# Altium PCB SP3T.PcbDoc
Units mm, origin at the board's own origin, x right, y up, seen from the top; angles counter-clockwise.
Board outline 44 x 35 mm, 4 copper layers (Top Layer, Signal Layer 2, Signal Layer 1, Bottom Layer), stack 1.47 mm thick; 25 components, 9 nets, 83 pads, 159 vias.
Unrouted connection lines stored in the file: 5.
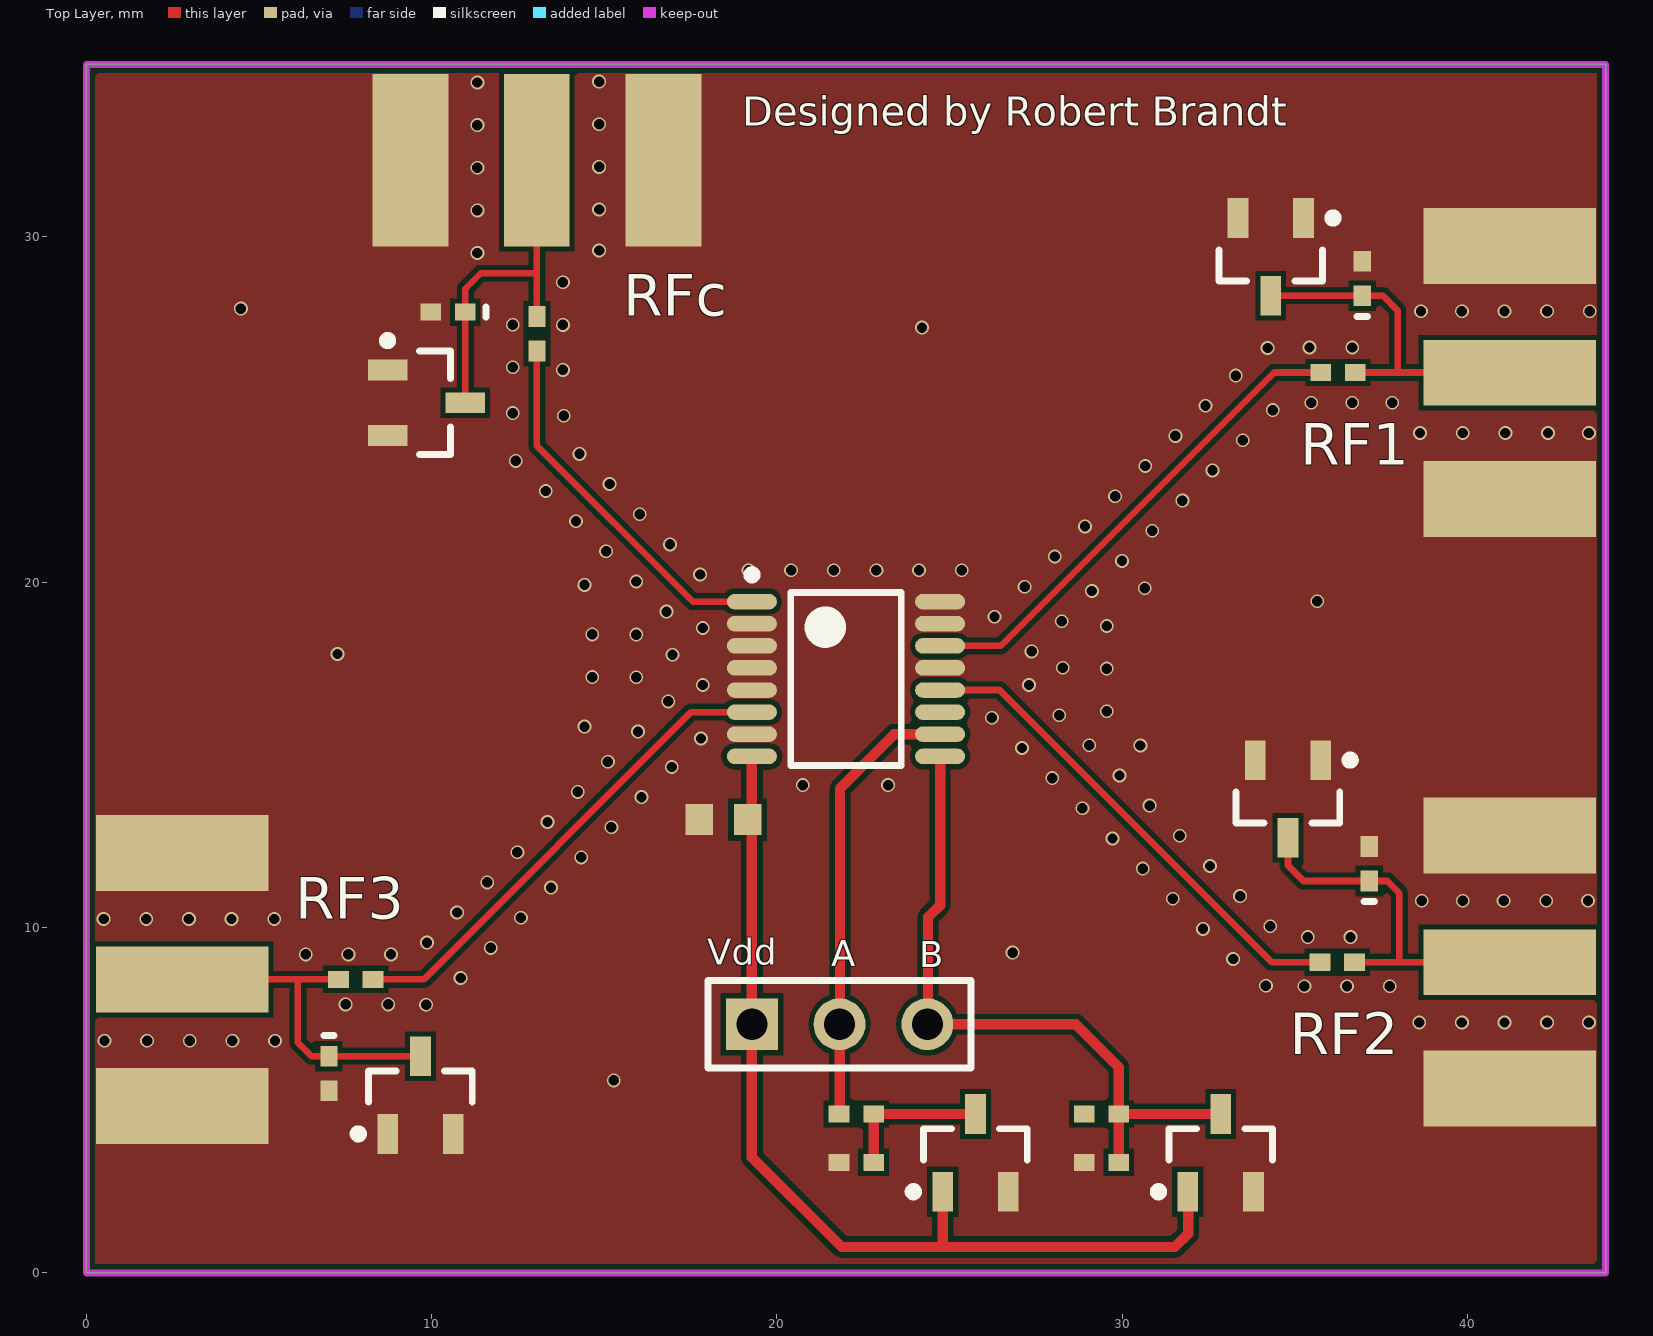
[diagram p0: Top Layer view]
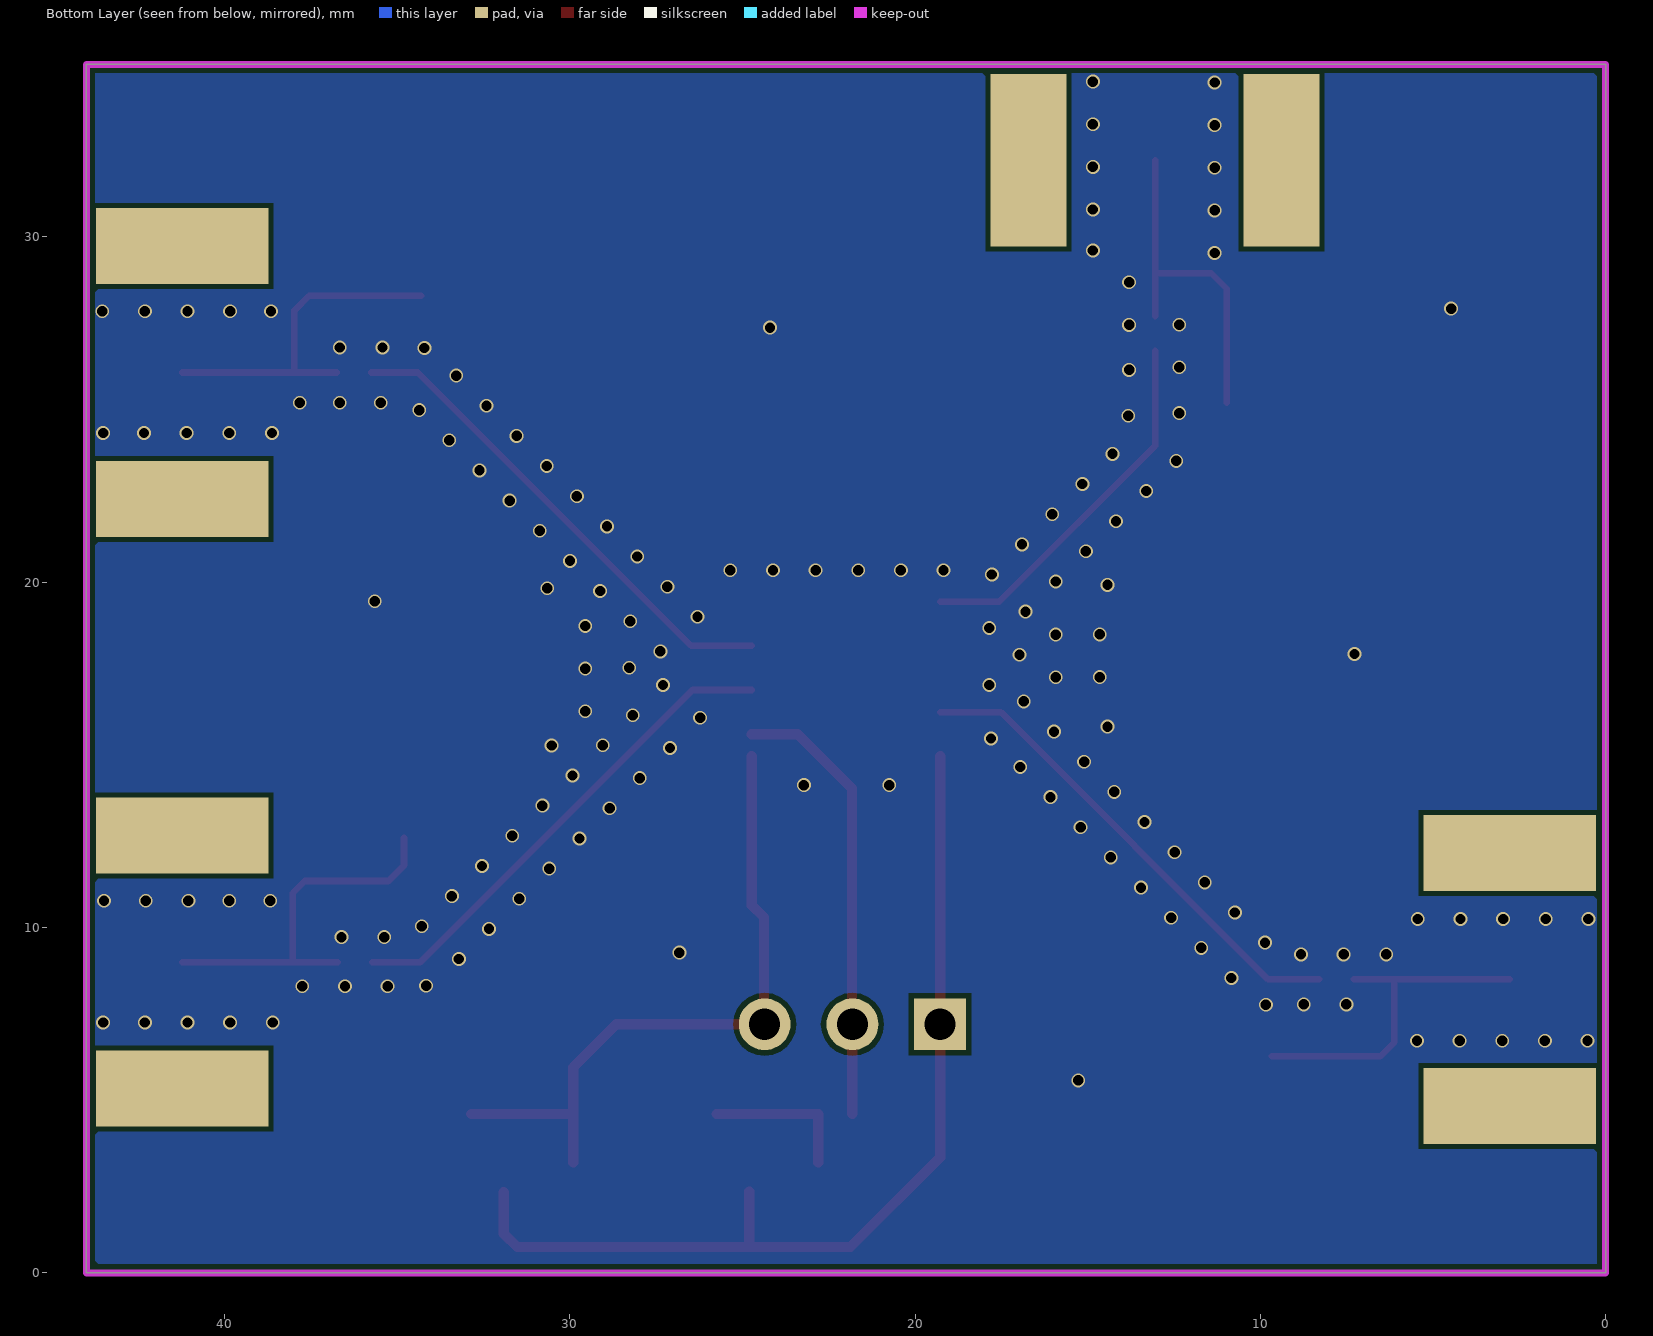
[diagram p1: Bottom Layer view, seen from below]
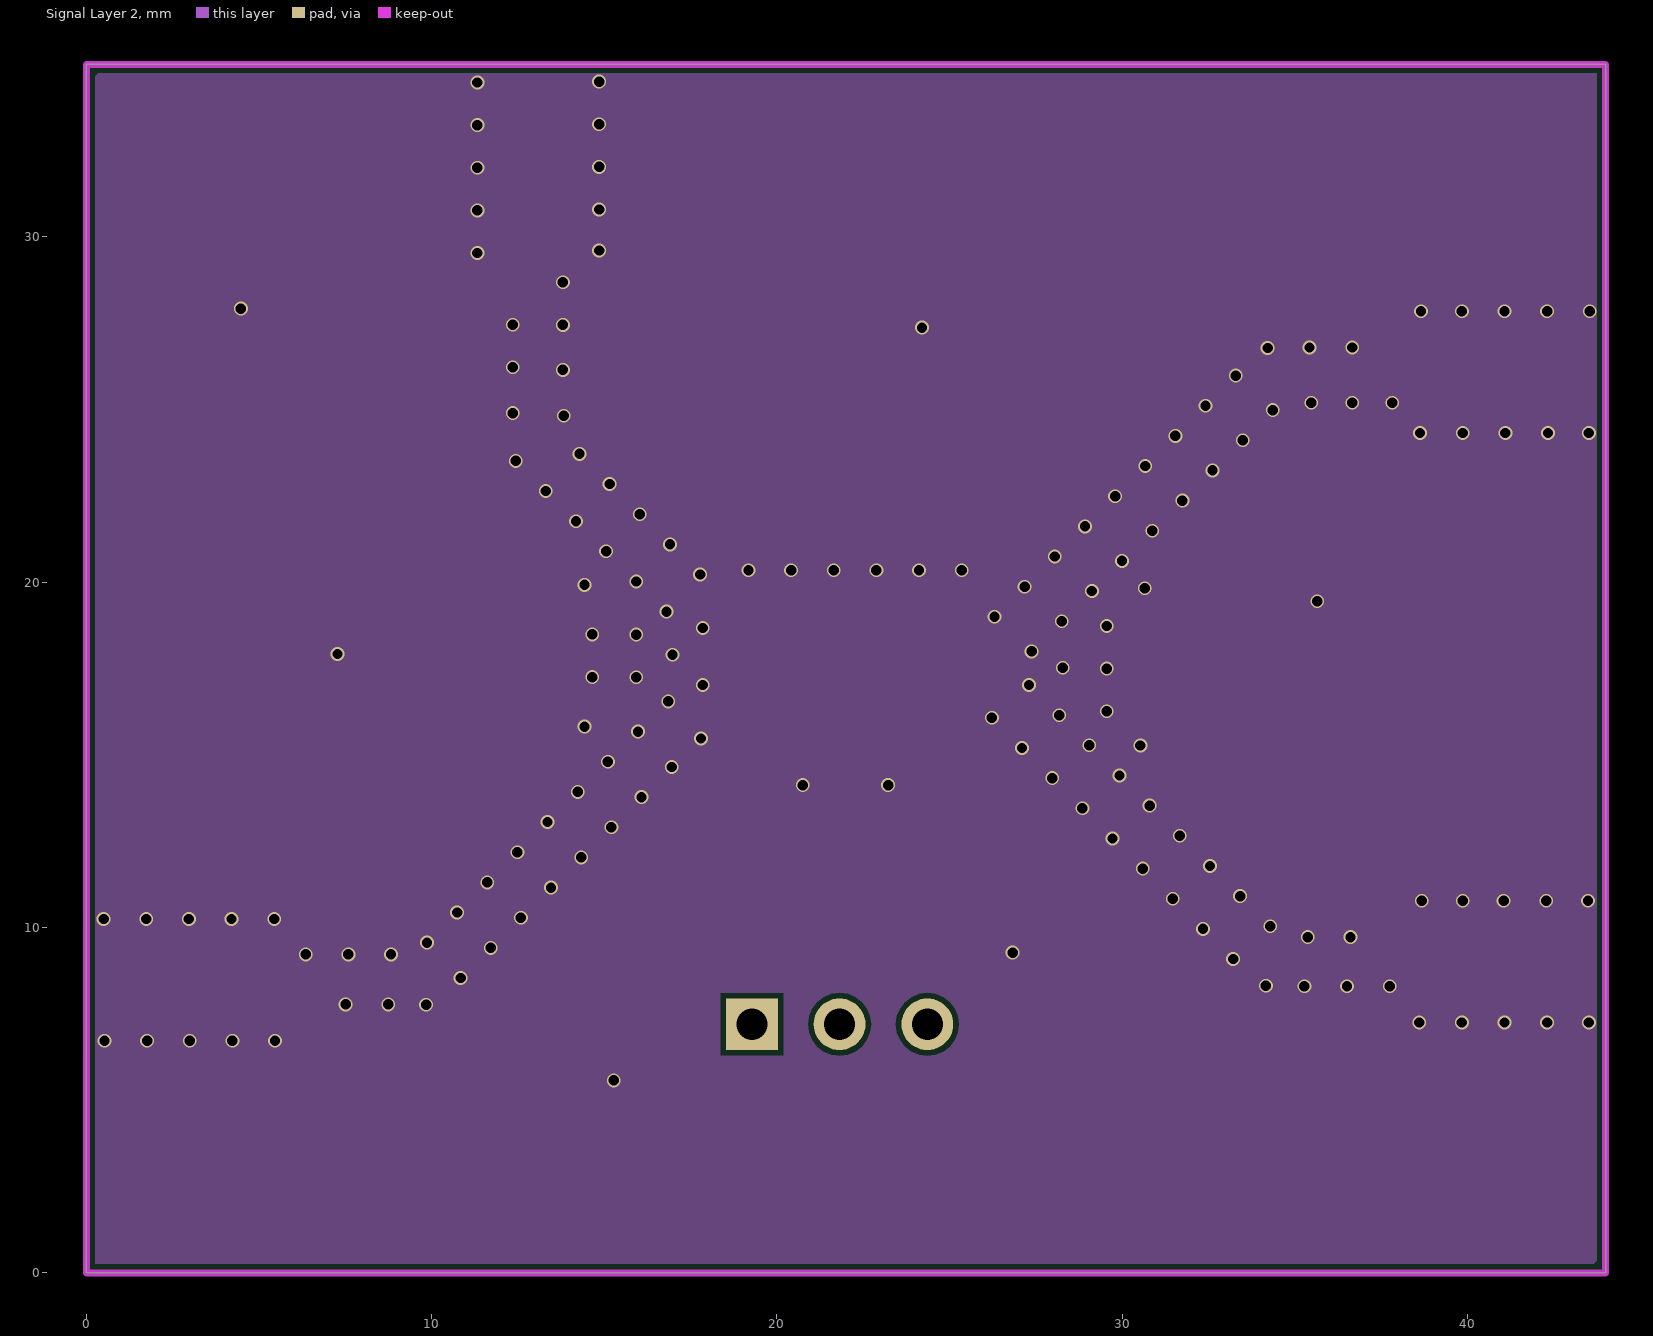
[diagram p2: Signal Layer 2]
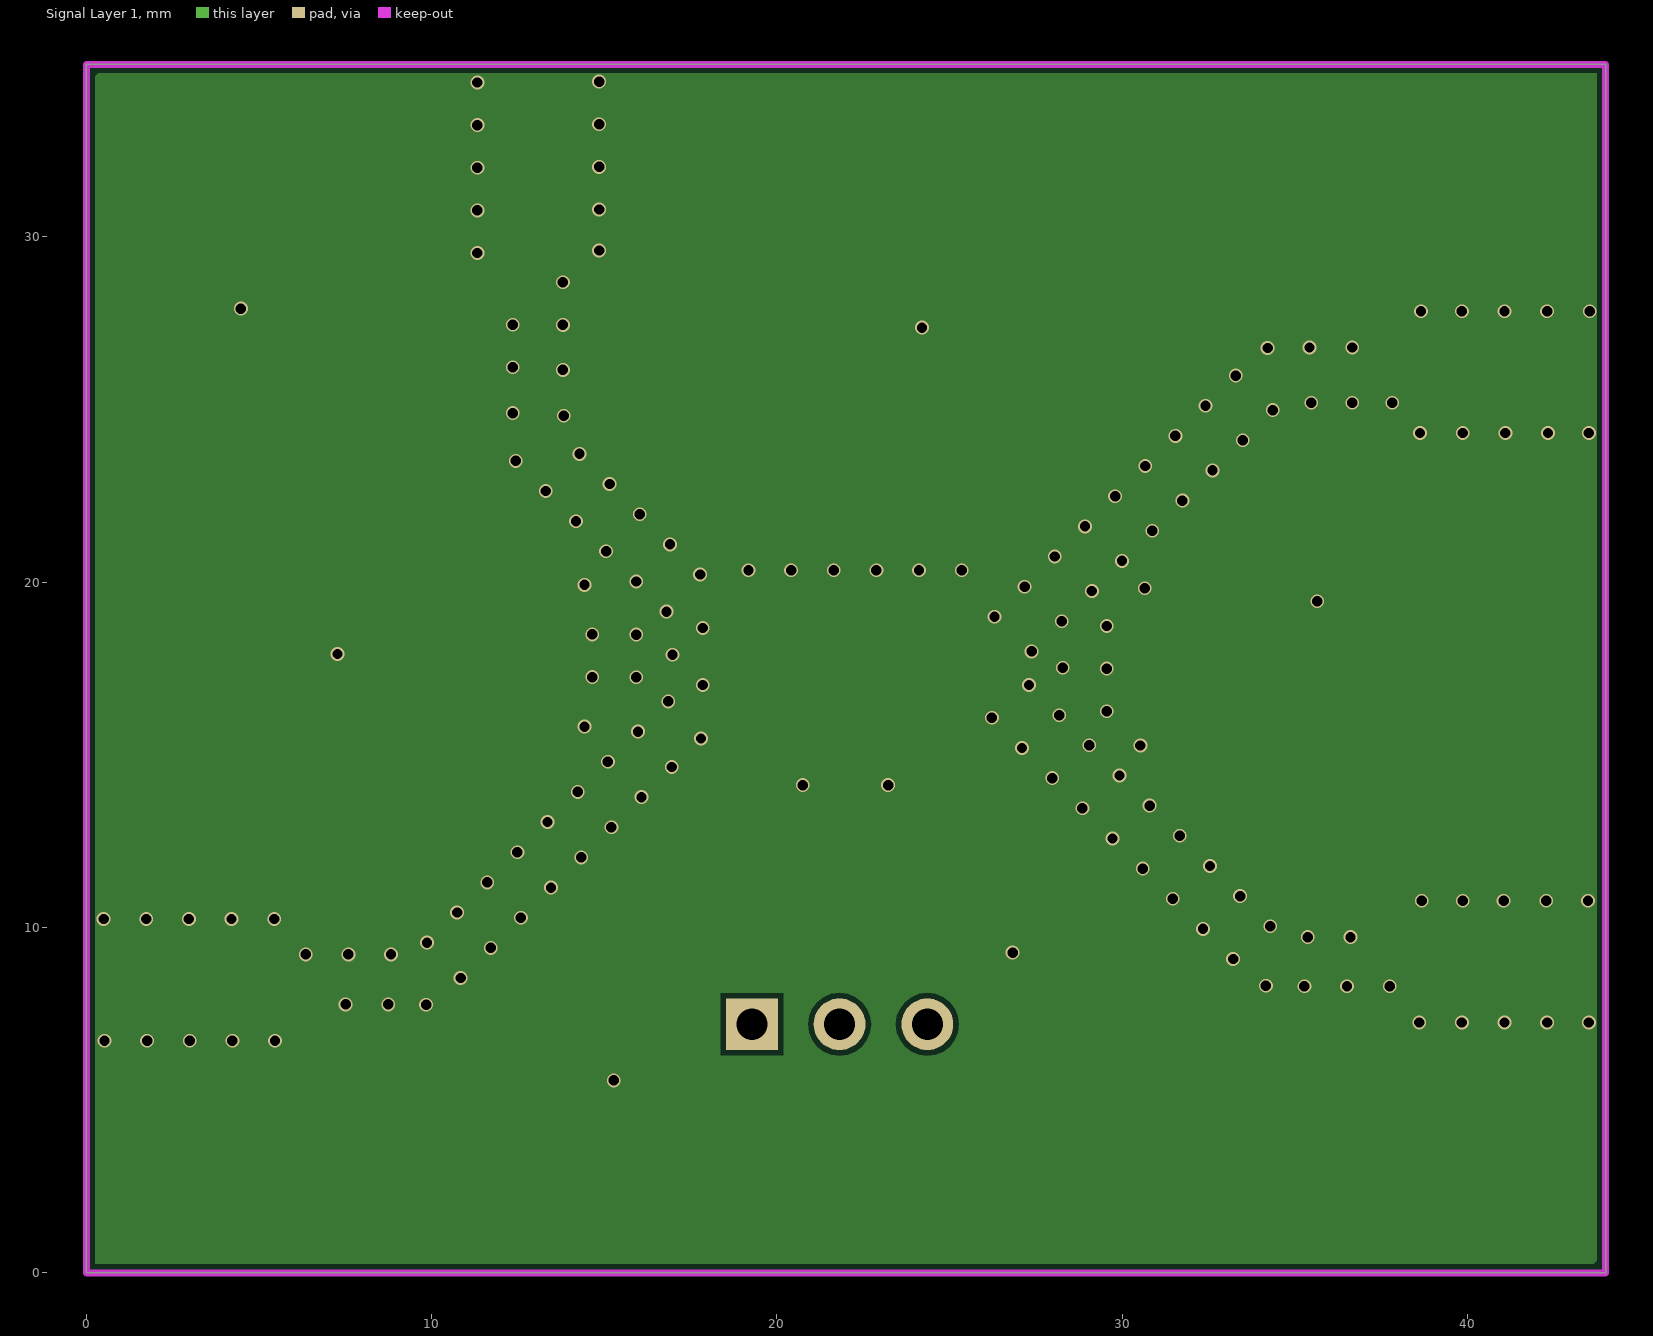
[diagram p3: Signal Layer 1]

## Layer stack, top to bottom
Top Solder: solder mask 0.0102, Solder Resist, Dk 3.5
Top Layer: signal copper 0.0356
Dielectric1: core 0.6, FR-4, Dk 4.2
Signal Layer 2: signal copper 0.036
Prepreg: prepreg 0.127, Dk 4.2
Signal Layer 1: signal copper 0.036
Dielectric2: core 0.6, Dk 4.2
Bottom Layer: signal copper 0.0356
Bottom Solder: solder mask 0.0102, Solder Resist, Dk 3.5

## Board outline
0,0 0,35 44,35 44,0

## Design rules (kind name [scope] priority, off if disabled: settings)
Clearance [All] p1: gap=0.153
FabricationTestPointUsage TestPointUsage [All] p1: valid=0 allowmultiple=FALSE
FabricationTestpoint Testpoint [All] p1: side=3 testpointundercomponent=TRUE minsize=1.016 maxsize=2.54 preferedsize=1.524 minholesize=0 maxholesize=1.016 preferedholesize=0.813 testpointgrid=0.025 allowsidetop=TRUE allowsidebottom=TRUE usegrid=TRUE gridtolerance=0
PlaneClearance [All] p1: clearance=0.2
PolygonConnect [All] p1: connectstyle=Direct reliefconductorwidth=0.254 reliefentries=4 polygonreliefangle="90 Angle" airgapwidth=0.254
RoutingVias [InNet('GND')] p1: holewidth=0.711 width=1.27 viastyle="Through Hole" minholewidth=0.711 minwidth=1.27 maxholewidth=0.711 maxwidth=1.27
SilkToSolderMaskClearance SilkscreenOverComponentPads [IsPad] p1: minsilkscreentomaskgap=0.254 clearancetoexposedcopper=TRUE
SolderMaskExpansion [All] p1: expansion=0.102
UnpouredPolygon [All] p1: allowunpoured=FALSE
Width [All] p1: maxlimit=0.19 minlimit=0.19 preferedwidth=0.19
25 further rules are at their usual default settings.

## Components (designator, comment, footprint, x,y, rotation, side; value= is the part's Value field where it differs from the comment)
D1_EN "Diode" SOT-23_N 32.85,3.475 r90 top
D1_EN "Diode" SOT-23_N 25.75,3.475 r90 top
D1_EN "Diode" SOT-23_N 9.85,25.2 r0 top
D1_EN "Diode" SOT-23_N 9.675,5.15 r90 top
D1_EN "Diode" SOT-23_N 34.8,13.725 r270 top
D1_EN "Diode" SOT-23_N 34.3,29.425 r270 top
"R1_EN 133K" "" 0402 29.4,3.2 r0 top
"R1_EN 133K" "" 0402 22.3,3.2 r0 top
"R1_EN 500" "" 0402 29.4,4.6 r180 top
"R1_EN 500" "" 0402 22.3,4.6 r180 top
? "Comment" HDR1X3 19.275,7.2 r0 top
? "Comment" J502-ND 41.225,9 r90 top
? "Comment" J502-ND 41.225,26.075 r90 top
? "Comment" J502-ND 2.775,8.5 r90 top
? "Comment" J502-ND 13.05,32.225 r0 top
? "Comment" 1608[0603] 18.45,13.125 r0 top
? "Comment" 0402 36.225,9 r0 top
? "Comment" 0402 36.25,26.075 r0 top
? "Comment" 0402 7.8,8.5 r0 top
? "Comment" 0402 13.05,27.2 r270 top
? "Comment" SP3T 22,17.2 r0 top
? "Comment" 0402-A 10.475,27.825 r180 top
? "Comment" 0402-A 7.025,5.775 r270 top
? "Comment" 0402-A 37.15,11.85 r90 top
? "Comment" 0402-A 36.95,28.8 r90 top

## Footprints (in the part's own frame and the unit in brackets; to place one, negate y for a bottom-side part, rotate by r counter-clockwise, add the part's x,y. Pads: shape width x height; smd on the part's side, far side on the other; paste and mask are expansions set on the pad)
0402 [mm] "Chip Capacitor, Body 1.0x0.5mm, IPC High Density"
  rect 0.6x0.5 smd: 1(-0.5,0) 2(0.5,0)
  body extent -0.55,-0.3 0.55,0.3, height 1.3
0402-A [mm] "Chip Inductor, Body 1.0x0.5mm, IPC High Density"
  rect 0.6x0.5 smd: 1(-0.5,0) 2(0.5,0)
  silkscreen extent -1.1,-0.15 -1.1,0.15, body extent -0.55,-0.3 0.55,0.3, height 0.55
1608[0603] [mm] "Chip Capacitor, Body 1.6x0.8mm, IPC High Density"
  rect 0.8x0.9 smd: 1(-0.7,0) 2(0.7,0)
  body extent -0.87,-0.48 0.87,0.48, height 1.3
HDR1X3 [mm] "Connector; Header; 3 Position"
  rect 1.5x1.5 hole 0.9: 1(0,0)
  round 1.5 hole 0.9: 2(2.54,0) 3(5.08,0)
  silkscreen extent -1.27,-1.27 6.35,1.27
J502-ND [mm]
  rect 1.9x5 smd: 1(-0.003,0)
  rect 2.2x5 smd: 2(-3.661,0) 3(3.661,0)
  rect 2.2x5 smd far side: 4(-3.661,0) 5(3.661,0)
SOT-23_N [mm] "SOT23, 3-Leads, Body 2.9x1.3mm, Pitch 0.95mm, Lead Span 2.5mm, IPC Medium Density"
  rect 1.15x0.6 smd: 1(-1.125,0.95) 2(-1.125,-0.95) 3(1.125,0)
  silkscreen extent -1.25,-1.5 0.7,1.92, body extent -0.7,-1.5 0.7,1.5, height 1.1
SP3T [mm] "SOP, 16-Leads, Body 4.90x3.90mm, Pitch 0.64mm, IPC Medium Density"
  oval 1.45x0.45 smd: 1(-2.725,2.24) 2(-2.725,1.6) 3(-2.725,0.96) 4(-2.725,0.32) 5(-2.725,-0.32) 6(-2.725,-0.96) 7(-2.725,-1.6) 8(-2.725,-2.24) 9(2.725,-2.24) 10(2.725,-1.6) 11(2.725,-0.96) 12(2.725,-0.32) 13(2.725,0.32) 14(2.725,0.96) 15(2.725,1.6) 16(2.725,2.24)
  silkscreen extent -2.85,-2.5 1.6,3.14

## Part data
"R1_EN 133K" "R1_EN 133K" "R1_EN 500" "R1_EN 500": library part Res1, "Resistor"
?: library part "Header 3"
? ? ? ?: library part J502-ND
? ? ? ? ?: library part "Cap Semi"
? ? ? ?: library part Inductor

## Via types
v1: diameter 0.4, hole 0.3, Top Layer to Bottom Layer, 159 vias

## Nets (pads, with @x,y where several pads share a name; then routed paths per layer and width w, separated by ;. In a path a pad name is that pad's centre, name@x,y a point inside that pad or via, vN(x,y) a via of type N, cw(c..) or ccw(c..) an arc to the next point about the centre after c; other vN are vias at no path point)
GND: "R1_EN 133K.1" ?.1@17.75,13.125 ?.2@2.775,4.839 ?.2@7.025,5.275 ?.2@9.389,32.225 ?.2@9.975,27.825 ?.2@19.275,18.8 ?.2@36.95,29.3 ?.2@37.15,12.35 ?.2@41.225,5.339 ?.2@41.225,22.414 ?.3@2.775,12.161 ?.3@16.711,32.225 ?.3@19.275,18.16 ?.3@41.225,12.661 ?.3@41.225,29.736 ?.4@19.275,17.52 ?.5@19.275,16.88 ?.7 ?.13 ?.15 ?.16 D1_EN.1@8.725,4.025 D1_EN.1@8.725,26.15 D1_EN.1@35.25,30.55 D1_EN.1@35.75,14.85 D1_EN.2
  other v1: 15.275,5.575 0.525,6.725 1.76,6.725 2.995,6.725 4.23,6.725 5.465,6.725 38.6,7.25 39.835,7.25 41.07,7.25 42.305,7.25 43.515,7.25 9.841,7.766 7.51,7.775 8.745,7.775 35.275,8.3 36.51,8.3 37.745,8.3 34.159,8.316 10.839,8.539 33.211,9.089 6.355,9.225 7.59,9.225 8.825,9.225 26.825,9.275 11.712,9.412 9.864,9.564 35.375,9.725 36.61,9.725 32.338,9.962 34.286,10.039 0.5,10.25 1.735,10.25 2.97,10.25 4.205,10.25 5.44,10.25 12.585,10.285 10.737,10.437 38.675,10.775 39.86,10.775 41.045,10.775 42.28,10.775 43.49,10.775 31.465,10.835 33.413,10.912 13.459,11.159 11.61,11.31 30.591,11.709 32.54,11.785 14.332,12.032 12.484,12.184 29.718,12.582 31.666,12.659 15.205,12.905 13.357,13.057 28.845,13.455 30.793,13.532 16.078,13.778 14.23,13.93 20.75,14.125 23.22,14.125 27.972,14.328 29.92,14.405 16.952,14.652 15.103,14.803 27.098,15.202 29.047,15.278 30.525,15.275 17.8,15.475 15.977,15.677 14.425,15.82 26.225,16.075 28.173,16.152 29.55,16.265 16.85,16.55 17.85,17.025 27.3,17.025 14.65,17.255 15.925,17.25 29.55,17.5 28.275,17.525 16.975,17.9 7.275,17.925 27.375,18 15.925,18.485 14.65,18.49 17.85,18.675 29.55,18.735 28.248,18.873 26.3,19 16.8,19.15 35.65,19.45 29.122,19.747 30.65,19.825 27.173,19.873 14.425,19.925 15.927,20.023 17.775,20.225 19.175,20.35 20.41,20.35 21.645,20.35 22.88,20.35 24.115,20.35 25.35,20.35 29.995,20.62 28.047,20.747 15.053,20.897 16.902,21.098 30.868,21.493 28.92,21.62 14.18,21.77 16.028,21.972 31.741,22.366 29.793,22.493 13.307,22.643 15.155,22.845 32.615,23.24 30.666,23.366 12.434,23.516 14.282,23.718 33.488,24.113 31.54,24.24 38.625,24.325 39.86,24.325 41.095,24.325 42.33,24.325 43.515,24.325 13.825,24.825 12.35,24.9 34.361,24.986 32.413,25.113 35.475,25.2 36.66,25.2 37.82,25.2 33.286,25.986 13.8,26.15 12.35,26.225 34.209,26.784 35.425,26.8 36.66,26.8 24.2,27.375 12.35,27.46 13.8,27.455 38.65,27.85 39.835,27.85 41.07,27.85 42.305,27.85 43.54,27.85 4.475,27.925 13.8,28.69 11.325,29.535 14.85,29.61 11.325,30.77 14.85,30.795 11.325,32.005 14.85,32.03 11.325,33.24 14.85,33.265 11.325,34.475 14.85,34.5
Net_A: "R1_EN 133K.2"@22.8,3.2 "R1_EN 500.1"@22.8,4.6 "R1_EN 500.2"@21.8,4.6 ?.2@21.815,7.2 ?.10 D1_EN.3@25.75,4.6 | length 17.3
  Top Layer w0.3: 21.815,4.6 ?.2@21.815,7.2 ; ?.2@21.825,7.2 21.825,14.025 23.4,15.6 ?.10 ; 22.8,3.2 22.8,4.6 D1_EN.3@25.75,4.6
Net_B: "R1_EN 133K.2"@29.9,3.2 "R1_EN 500.1"@29.9,4.6 ?.3@24.355,7.2 ?.9 D1_EN.3@32.85,4.6 | length 19.7
  Top Layer w0.3: ?.3@24.355,7.2 28.65,7.2 29.9,5.95 29.9,4.6 ; ?.3@24.375,7.2 24.375,10.3 24.725,10.65 ?.9 ; 29.9,3.2 29.9,4.6 ; D1_EN.3@32.85,4.6 29.9,4.6
Net_RF1: ?.1@35.75,26.075 ?.1@36.95,28.3 ?.1@41.225,26.072 ?.2@36.75,26.075 ?.14 D1_EN.3@34.3,28.3 | length 24.3
  Top Layer w0.19: ?.14 26.485,18.16 34.4,26.075 ?.1@35.75,26.075 ; D1_EN.3@34.3,28.3 37.55,28.3 37.975,27.875 37.975,26.2 ; ?.2@36.75,26.075 ?.1@41.222,26.075
Net_RF2: ?.1@35.725,9 ?.1@37.15,11.35 ?.1@41.225,8.997 ?.2@36.725,9 ?.12 D1_EN.3@34.8,12.6 | length 25.1
  Top Layer w0.19: ?.12 26.445,16.88 34.325,9 ?.1@35.725,9 ; D1_EN.3@34.8,12.6 34.8,11.8 35.25,11.35 37.15,11.35 37.675,11.35 38.025,11 38.025,9 ; ?.2@36.725,9 38.025,9 ; ?.1@41.222,9 38.025,9
Net_RF3: ?.1@2.775,8.497 ?.1@7.3,8.5 ?.1@7.025,6.275 ?.2@8.3,8.5 ?.6 D1_EN.3@9.675,6.275 | length 24.2
  Top Layer w0.19: ?.1@2.778,8.5 6.125,8.5 ; ?.1@7.3,8.5 6.125,8.5 ; ?.2@8.3,8.5 9.775,8.5 17.515,16.24 ?.6 ; D1_EN.3@9.675,6.275 7.025,6.275 6.525,6.275 6.125,6.675 6.125,8.5
Net_RFc: ?.1@10.975,27.825 ?.1@13.05,27.7 ?.1@13.047,32.225 ?.1@19.275,19.44 ?.2@13.05,26.7 D1_EN.3@10.975,25.2 | length 20.9
  Top Layer w0.19: D1_EN.3@10.975,25.2 10.975,28.5 11.425,28.95 13.047,28.95 ; ?.1@13.047,27.703 13.047,28.95 ; ?.1@13.047,32.225 13.047,28.95 ; ?.2@13.05,26.7 13.05,23.95 17.56,19.44 ?.1@19.275,19.44
Net_Vdd: ?.1@19.275,7.2 ?.2@19.15,13.125 ?.8 D1_EN.1@24.8,2.35 D1_EN.1@31.9,2.35 | length 28.3
  Top Layer w0.3: ?.8 19.275,7.2 19.275,3.35 21.875,0.75 31.525,0.75 31.912,1.138 D1_EN.1@31.912,2.338 ; 24.8,0.75 D1_EN.1@24.8,2.35
Net_vias: 
pads on no net: "R1_EN 500.2"@28.9,4.6 ?.4@2.775,4.839 ?.4@9.389,32.225 ?.4@41.225,5.339 ?.4@41.225,22.414 ?.5@2.775,12.161 ?.5@16.711,32.225 ?.5@41.225,12.661 ?.5@41.225,29.736 ?.11

## Polygon pours and split planes (outlines as drawn)
GND on Top Layer "Internal Layer 2" (solid, pour order 2): 0.25,34.75 0.25,0.25 43.75,0.25 43.75,34.75
GND on Bottom Layer "Internal Layer 2" (solid, pour order 6): 43.75,34.75 43.75,0.25 0.25,0.25 0.25,34.75
GND on Signal Layer 2 "Top Layer-No Net" (solid, pour order 4): 0.25,34.75 0.25,0.25 43.75,0.25 43.75,34.75
GND on Signal Layer 1 "Top Layer-No Net" (solid, pour order 6): 0.25,34.75 0.25,0.25 43.75,0.25 43.75,34.75

## Keep-outs
Keep-Out Layer:
  the board outline again, w0.2

## Silkscreen, mask and mechanical layers (free items; w line width, h text height)
Top Overlay:
  text "Designed by Robert Brandt" at 19,33.225 h0.85
  text "RFc" at 15.55,27.725 h1.2
  text "RF1" at 35.15,23.4 h1.2
  text "RF3" at 6.05,10.25 h1.2
  text "Vdd" at 17.975,8.925 h0.75
  text "A" at 21.575,8.875 h0.75
  text "B" at 24.125,8.85 h0.75
  text "RF2" at 34.85,6.325 h1.2
Mechanical 16:
  drawing of 1874 lines, arcs and shapes, not listed
  text "1" at -30.143,130.36 h1.78
  text "2" at 42.501,130.36 h1.78
  text "3" at 115.653,130.36 h1.78
  text "4" at 188.551,130.36 h1.78
  text "A" at -64.484,107.348 h1.78
  text "A" at 222.536,107.348 h1.78
  text "B" at -64.484,59.291 h1.78
  text "B" at 222.536,59.291 h1.78
  text "C" at -64.484,10.777 h1.78
  text "C" at 222.536,10.777 h1.78
  text "ENGINEER:" at 107.601,-26.231 h1.14
  text "TITLE:" at 145.701,-26.231 h1.14
  text "PCB DESIGNER:" at 107.601,-33.724 h1.14
  text "D" at -64.484,-37.229 h1.78
  text "D" at 222.536,-37.229 h1.78
  text "DATE:" at 107.601,-41.471 h1.14
  text "PART NO.:" at 145.701,-41.471 h1.14
  text "REV:" at 199.041,-41.471 h1.14
  text "Altium Limited" at 74.581,-44.011 h1.78
  text ".PRINT_DATE" at 108.871,-44.519 h1.78
  text "12a Rodborough Rd" at 74.581,-46.551 h1.78
  text "Frenchs Forest" at 74.581,-49.091 h1.78
  text "FILE NAME:" at 107.601,-49.091 h1.14
  text "DWG NO:" at 145.701,-49.091 h1.14
  text "SCALE:" at 199.041,-49.091 h1.14
  text "NSW 2086" at 74.581,-51.631 h1.78
  text ".PCB_FILE_NAME_NO_PATH" at 108.871,-52.139 h1.78
  text "1" at -30.143,-57.6 h1.78
  text "2" at 42.501,-57.6 h1.78
  text "3" at 115.653,-57.6 h1.78
  text "4" at 188.551,-57.6 h1.78